# EAGLE board PCB_OpenBook (EAGLE 9.7.0)
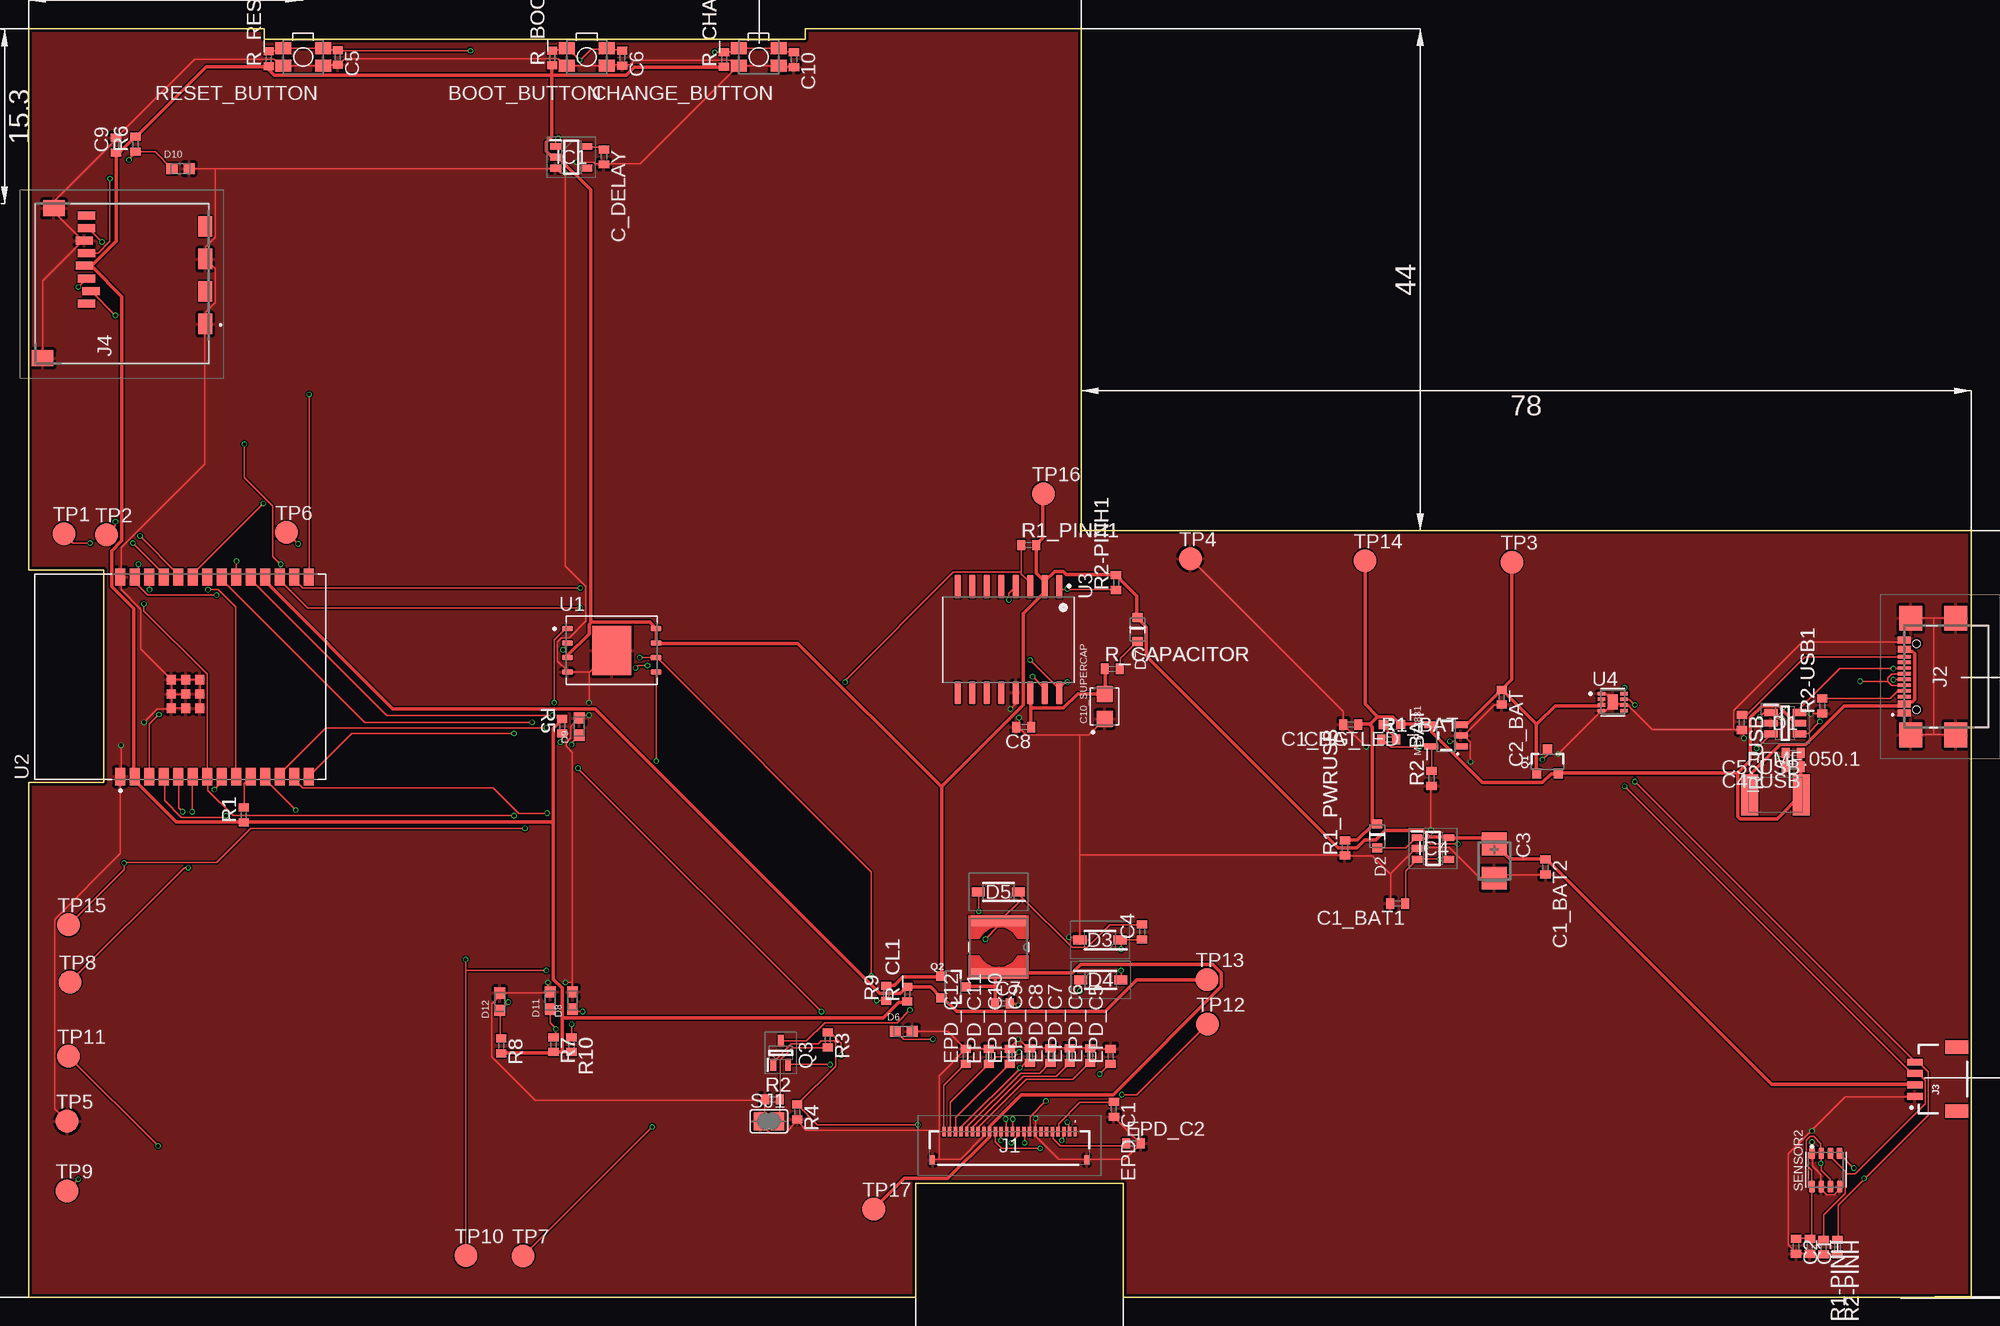
[diagram p0: board, top side]
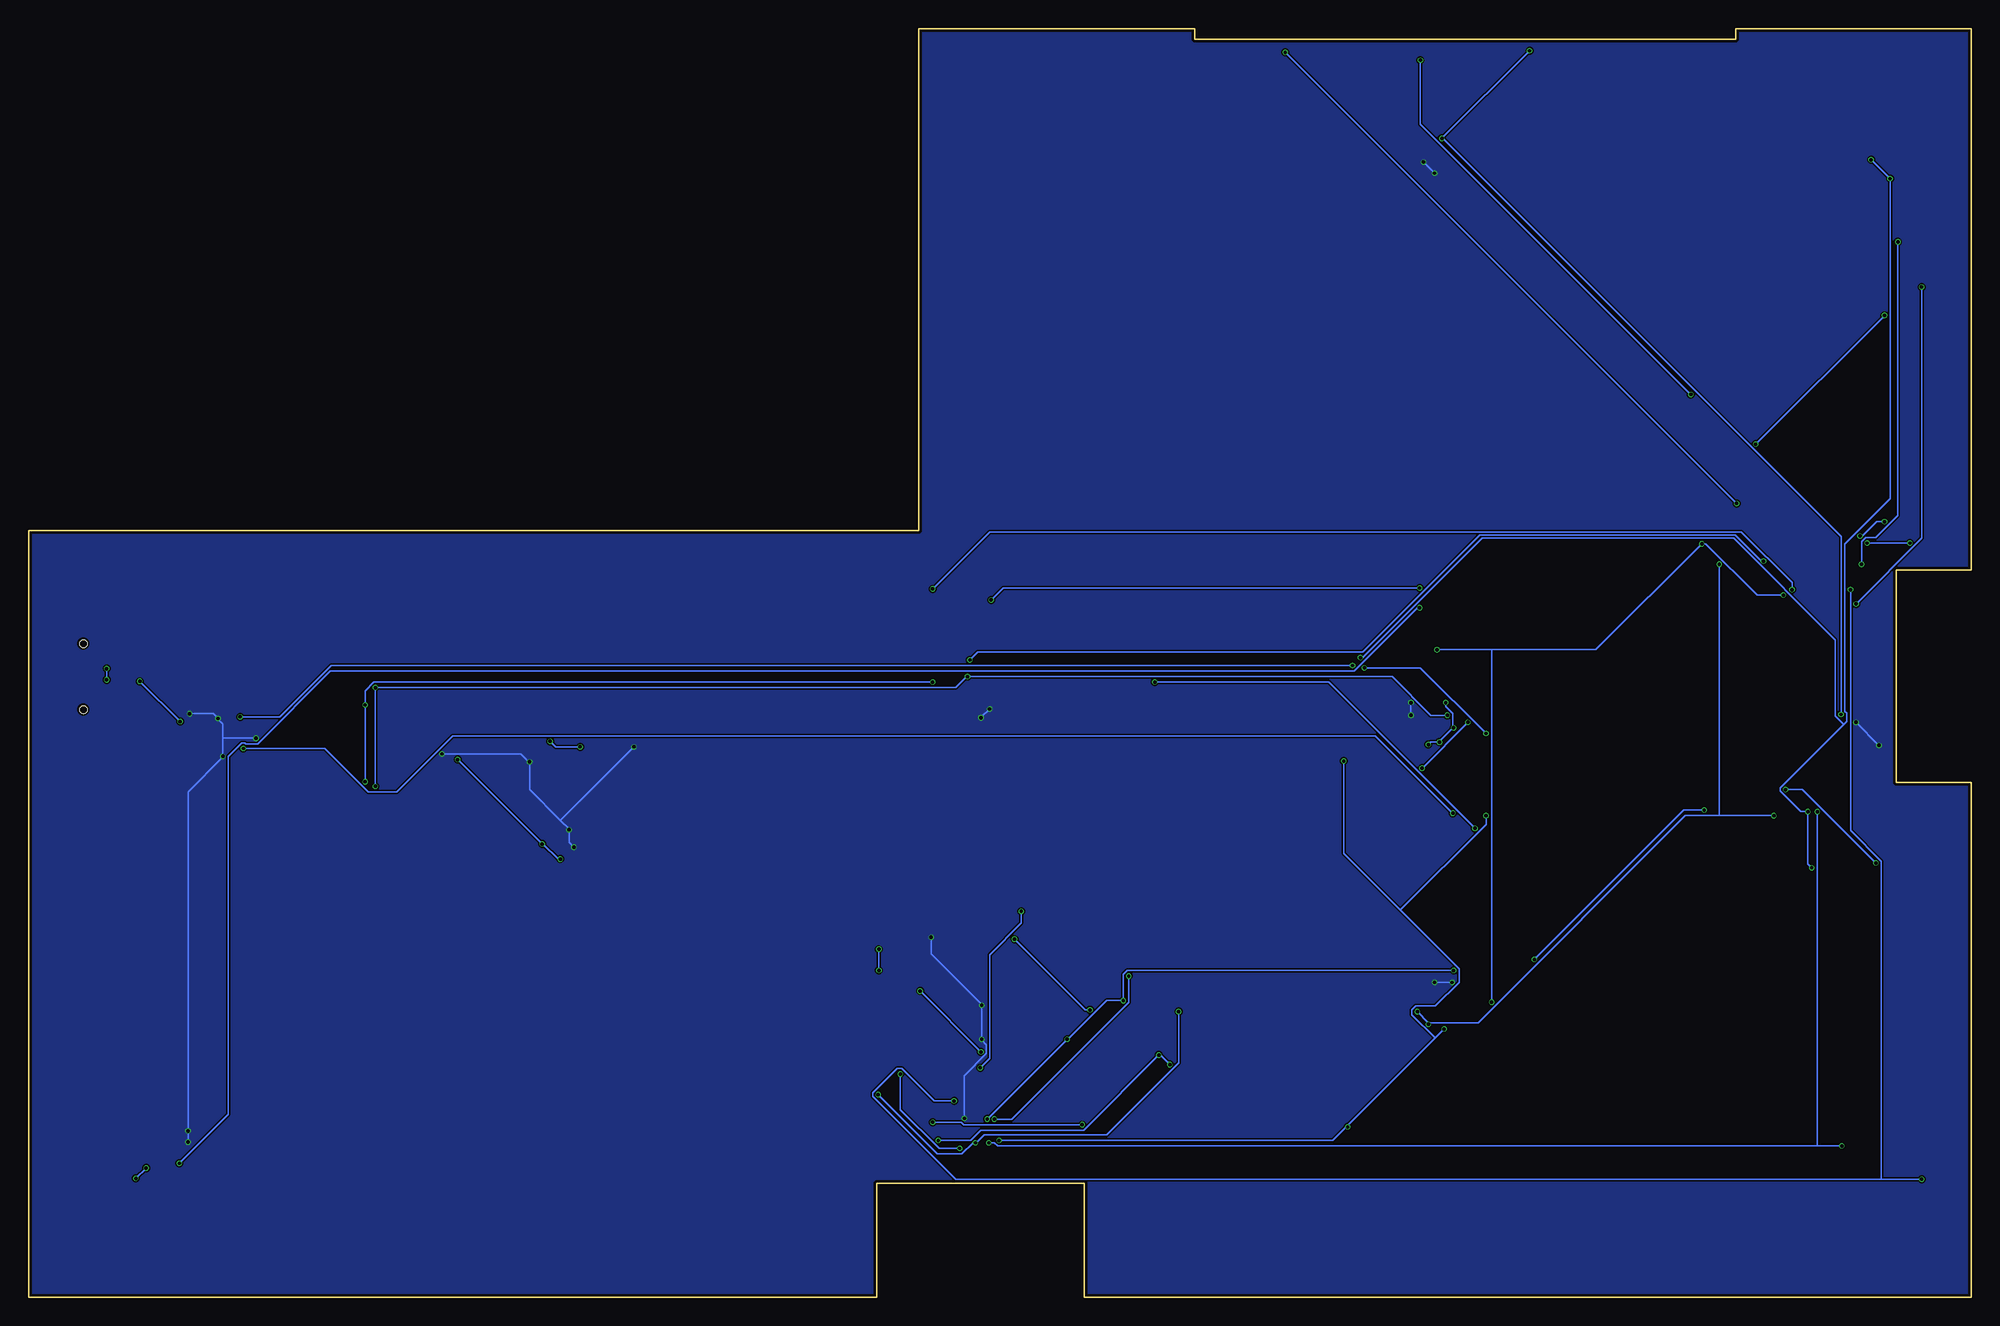
[diagram p1: board, bottom side, seen from below]

Size 170.2 x 111.2 mm. Coordinates in mm from the lower left corner, seen from the top.
Outline: 0,111.2 0,63.75 6.6,63.75 6.6,45.15 0,45.15 0,0 77.71,0 77.71,10 95.91,10 95.91,0 170.2,0 170.2,67.2 92.2,67.2 92.2,111.2 68.03,111.2 68.03,110.26 20.65,110.26 20.65,111.2 0,111.2
Copper layers (1*16): Top 0.035mm / dielectric 1.6mm / Bottom 0.035mm
Design rules "jlcpcb-2layers.dru *": minimum track width 0.15mm, minimum drill 0.3mm, track to track 5mil, track to pad 5mil, pad to pad 5mil, via to via 5mil, smd to smd 5mil, copper to edge 0.2mm, drill to drill 6mil, minimum pad ring 10mil, minimum via ring 3mil, stop-mask expansion 4mil, vias tented up to drill 0mil, thermal gap 10mil
Net classes: 1 trasee_putere: width 0.3 mm

## Footprints (pad centres in the part's own frame; a part is rotated, then mirrored left to right if it is on the bottom)
MYBUTTON = smd 1.4 x 1.05: 1 1.75,0.75; 2 -1.75,0.75; 3 -1.75,-0.75; 4 1.75,-0.75
ESP32_WROVER_EAGLE-LTSPICE_C0402 = smd 0.7 x 0.9: 1 -0.65,0; 2 0.65,0
RCL_CT3528 = smd 2 x 2.2: + -1.5,0; - 1.5,0
CAPCP3225X100N = smd 1.4 x 1.4: 1 -1.1,0; 2 1.1,0
ADAFRUIT_CHIP-LED0603 = smd 0.8 x 0.8: A 0,-0.75; C 0,0.75
SOT95P280X145-6N = smd 1.2 x 0.6: 1 -1.25,0.95; 2 -1.25,0; 3 -1.25,-0.95; 4 1.25,-0.95; 5 1.25,0; 6 1.25,0.95
ESP32_WROVER_AVX---SD0805S020S1R0_AVX_SD0805S020S1R0_0 = smd 0.8 x 0.9: 1 -1.05,0; 2 1.05,0
SOD3716X135N = smd 1.15 x 0.8: 1 -1.75,0; 2 1.75,0
DIOC1608X36N = smd 0.97 x 0.94: 1 -0.75,0; 2 0.75,0
SOT95P280X125-5N = smd 0.9 x 0.6: 1 -1.4,0.95; 2 -1.4,0; 3 -1.4,-0.95; 4 1.4,-0.95; 5 1.4,0.95
SOT95P280X120-5N = smd 0.9 x 0.6: 1 -1.4,0.95; 2 -1.4,0; 3 -1.4,-0.95; 4 1.4,-0.95; 5 1.4,0.95
FH34SRJ24S05SH99 = smd 0.3 x 0.8: 1 5.75,1.45; 2 5.25,1.45; 3 4.75,1.45; 4 4.25,1.45; 5 3.75,1.45; 6 3.25,1.45; 7 2.75,1.45; 8 2.25,1.45; 9 1.75,1.45; 10 1.25,1.45; 11 0.75,1.45; 12 0.25,1.45; 13 -0.25,1.45; 14 -0.75,1.45; 15 -1.25,1.45; 16 -1.75,1.45; 17 -2.25,1.45; 18 -2.75,1.45; 19 -3.25,1.45; 20 -3.75,1.45; 21 -4.25,1.45; 22 -4.75,1.45; 23 -5.25,1.45; 24 -5.75,1.45 | smd 0.4 x 0.8: MP1 6.75,-1.05; MP2 -6.75,-1.05
SAMACSYS_PARTS_USB4110GFA = smd 0.3 x 1.15: A1 -3.35,3.678; A4 -2.55,3.678; A5 -1.25,3.678; A6 -0.25,3.678; A7 0.25,3.678; A8 1.25,3.678; A9 2.55,3.678; A12 3.35,3.678; B1 3.05,3.678; B4 2.25,3.678; B5 1.75,3.678; B6 0.75,3.678; B7 -0.75,3.678; B8 -1.75,3.678; B9 -2.25,3.678; B12 -3.05,3.678 | smd 2.18 x 2: MP1 -5.11,-0.827; MP2 5.11,-0.827; MP3 -5.11,3.103; MP4 5.11,3.103 | hole 0.65: -2.89,2.603; 2.89,2.603
JST04_1MM_RA = smd 0.6 x 1.35: 1 -1.5,0; 2 -0.5,0; 3 0.5,0; 4 1.5,0 | smd 1.2 x 2: NC1 2.8,-3.675; NC2 -2.8,-3.675
112ATAARR03ATTEND = smd 1.8 x 1.2: G1 10.6,10.4; G2 4.9,10.4; S1 7.75,10.4; S2 2.05,10.4 | smd 1.4 x 1.9: G3 13.6,-3.85; G4 0.45,-2.85 | smd 0.7 x 1.5: P1 8.8,0; P2 7.7,0.4; P3 6.6,0; P4 5.5,-0.2; P5 4.4,0; P6 3.3,-0.2; P7 2.2,0; P8 1.1,0
IND_4828-WE-TPC_WRE = smd 0.889 x 4.826: 1 -2.286,0; 2 2.286,0
ESP32_WROVER_SPARKFUN-IC-POWER_SOT23-5 = smd 0.55 x 1.2: 1 -0.95,-1.3; 2 0,-1.3; 3 0.95,-1.3; 4 0.95,1.3; 5 -0.95,1.3
ESP32C6_VARISTOR_CT/CN1812 = smd 1.5 x 3.6: 1 -2.25,0; 2 2.25,0
ESP32_WROVER_SPARKFUN-DISCRETESEMI_SOT23-3 = smd 0.8 x 0.9: 1 -0.95,-1; 2 0.95,-1; 3 0,1.1
SOT65P210X110-3N = smd 1.05 x 0.5: 1 -1.05,0.65; 2 -1.05,-0.65; 3 1.05,0
ESP32_WROVER_BME680_PSON80P300X300X100-8N = smd 1.016 x 0.5: 1 1.458,1.2; 2 1.458,0.4; 3 1.458,-0.4; 4 1.458,-1.2; 5 -1.458,-1.22; 6 -1.458,-0.4; 7 -1.458,0.4; 8 -1.458,1.2
SJ = smd 1.168 x 1.6: 1 -0.762,0; 2 0.762,0
TP20R = smd 2 x 2: TP 0,0
SON127P600X800X80-9N = smd 0.94 x 0.44: 1 -3.895,1.905; 2 -3.895,0.635; 3 -3.895,-0.635; 4 -3.895,-1.905; 5 3.895,-1.905; 6 3.895,-0.635; 7 3.895,0.635; 8 3.895,1.905 | smd 3.4 x 4.3: 9 0,0
XCVR_ESP32-C6-WROOM-1-N8 = smd 1.5 x 0.9: 1 -8.75,5.26; 2 -8.75,3.99; 3 -8.75,2.72; 4 -8.75,1.45; 5 -8.75,0.18; 6 -8.75,-1.09; 7 -8.75,-2.36; 8 -8.75,-3.63; 9 -8.75,-4.9; 10 -8.75,-6.17; 11 -8.75,-7.44; 12 -8.75,-8.71; 13 -8.75,-9.98; 14 -8.75,-11.25; 15 8.75,-11.25; 16 8.75,-9.98; 17 8.75,-8.71; 18 8.75,-7.44; 19 8.75,-6.17; 20 8.75,-4.9; 21 8.75,-3.63; 22 8.75,-2.36; 23 8.75,-1.09; 24 8.75,0.18; 25 8.75,1.45; 26 8.75,2.72; 27 8.75,3.99; 28 8.75,5.26 | smd 0.8 x 0.8: 29_1 -2.755,0.79; 29_2 -1.505,0.79; 29_3 -0.255,0.79; 29_4 -2.755,-0.46; 29_5 -1.505,-0.46; 29_6 -0.255,-0.46; 29_7 -2.755,-1.71; 29_8 -1.505,-1.71; 29_9 -0.255,-1.71
SOIC127P1032X265-16N = smd 2.05 x 0.59: 1 -4.655,4.445; 2 -4.655,3.175; 3 -4.655,1.905; 4 -4.655,0.635; 5 -4.655,-0.635; 6 -4.655,-1.905; 7 -4.655,-3.175; 8 -4.655,-4.445; 9 4.655,-4.445; 10 4.655,-3.175; 11 4.655,-1.905; 12 4.655,-0.635; 13 4.655,0.635; 14 4.655,1.905; 15 4.655,3.175; 16 4.655,4.445
SON50P200X200X80-9N = smd 0.76 x 0.3: 1 -0.985,0.75; 2 -0.985,0.25; 3 -0.985,-0.25; 4 -0.985,-0.75; 5 0.985,-0.75; 6 0.985,-0.25; 7 0.985,0.25; 8 0.985,0.75 | smd 0.9 x 1.3: 9 0,0

## Placement (x,y rotation side)
BOOT_BUTTON  BUTTON_CUSYOMV11  [MYBUTTON]  48.9,108.71 180 top
C1  100nF  [ESP32_WROVER_EAGLE-LTSPICE_C0402]  156.05,4.48 270 top
C1_BAT  4.7uF  [ESP32_WROVER_EAGLE-LTSPICE_C0402]  115.84,50.2 180 top
C1_BAT1  4.7uF  [ESP32_WROVER_EAGLE-LTSPICE_C0402]  119.95,34.52 180 top
C1_BAT2  4.7uF  [ESP32_WROVER_EAGLE-LTSPICE_C0402]  132.89,37.72 270 top
C2  100nF  [ESP32_WROVER_EAGLE-LTSPICE_C0402]  154.83,4.48 270 top
C2_BAT  4.7uF  [ESP32_WROVER_EAGLE-LTSPICE_C0402]  129.05,52.6 270 top
C3  100uF TANT  [RCL_CT3528]  128.41,38.25 270 top
C4  4.7uF/25V  [ESP32_WROVER_EAGLE-LTSPICE_C0402]  97.55,32.04 90 top
C4_USB  100nF  [ESP32_WROVER_EAGLE-LTSPICE_C0402]  154.6,46.52 180 top
C5  1uF  [ESP32_WROVER_EAGLE-LTSPICE_C0402]  27.09,108.66 270 top
C5_USB  4.7uF  [ESP32_WROVER_EAGLE-LTSPICE_C0402]  154.58,47.72 180 top
C6  100nF  [ESP32_WROVER_EAGLE-LTSPICE_C0402]  52.01,108.61 270 top
C7  10uF  [ESP32_WROVER_EAGLE-LTSPICE_C0402]  85.3,25.78 0 top
C8  100nF  [ESP32_WROVER_EAGLE-LTSPICE_C0402]  87.19,49.98 180 top
C9  100nF  [ESP32_WROVER_EAGLE-LTSPICE_C0402]  7.67,100.98 90 top
C10  100nF  [ESP32_WROVER_EAGLE-LTSPICE_C0402]  67.05,108.48 270 top
C10_SUPERCAP  CPH3225A  [CAPCP3225X100N]  94.26,51.79 90 top
C_DELAY  100nF  [ESP32_WROVER_EAGLE-LTSPICE_C0402]  50.41,99.94 270 top
CHANGE_BUTTON  BUTTON_CUSYOMV11  [MYBUTTON]  63.96,108.71 180 top
CHG_LED  [ADAFRUIT_CHIP-LED0603]  119.44,50.2 90 top
D1  USBLC6-2SC6Y  [SOT95P280X145-6N]  153.88,50.32 0 top
D2  ESP32_WROVER_AVX---SD0805S020S1R0_AVX_SD0805S020S1R0_0_01  [ESP32_WROVER_AVX---SD0805S020S1R0_AVX_SD0805S020S1R0_0]  118.15,40.43 270 top
D3  MBR0530  [SOD3716X135N]  93.86,31.32 180 top
D4  MBR0530  [SOD3716X135N]  93.92,27.83 0 top
D5  MBR0530  [SOD3716X135N]  84.96,35.53 180 top
D6  PGB1010603MR  [DIOC1608X36N]  76.68,23.32 0 top
D7  ESP32_WROVER_AVX---SD0805S020S1R0_AVX_SD0805S020S1R0_0_01  [ESP32_WROVER_AVX---SD0805S020S1R0_AVX_SD0805S020S1R0_0]  97.14,58.53 270 top
D8  PGB1010603MR  [DIOC1608X36N]  47.66,26.02 90 top
D9  PGB1010603MR  [DIOC1608X36N]  48.24,50.02 90 top
D10  PGB1010603MR  [DIOC1608X36N]  13.32,98.92 0 top
D11  PGB1010603MR  [DIOC1608X36N]  45.7,26.02 90 top
D12  PGB1010603MR  [DIOC1608X36N]  41.28,25.92 90 top
EPD_C1  1uF/50V  [ESP32_WROVER_EAGLE-LTSPICE_C0402]  95.08,16.5 270 top
EPD_C2  1uF/50V  [ESP32_WROVER_EAGLE-LTSPICE_C0402]  96.79,13.5 0 top
EPD_C5  0.1uF/50V  [ESP32_WROVER_EAGLE-LTSPICE_C0402]  94.79,21.14 90 top
EPD_C6  1uF/50V  [ESP32_WROVER_EAGLE-LTSPICE_C0402]  93,21.2 90 top
EPD_C7  1uF/50V  [ESP32_WROVER_EAGLE-LTSPICE_C0402]  91.21,21.2 90 top
EPD_C8  1uF/50V  [ESP32_WROVER_EAGLE-LTSPICE_C0402]  89.52,21.2 90 top
EPD_C9  1uF/50V  [ESP32_WROVER_EAGLE-LTSPICE_C0402]  87.73,21.2 90 top
EPD_C10  1uF/50V  [ESP32_WROVER_EAGLE-LTSPICE_C0402]  85.95,21.14 90 top
EPD_C11  1uF/50V  [ESP32_WROVER_EAGLE-LTSPICE_C0402]  84.11,21.12 90 top
EPD_C12  1uF/50V  [ESP32_WROVER_EAGLE-LTSPICE_C0402]  82.09,21.14 90 top
IC1  BD5229G-TR  [SOT95P280X125-5N]  47.55,99.92 0 top
IC4  XC6220A331MR-G  [SOT95P280X120-5N]  123.03,39.34 0 top
J1  FH34SRJ-24S-0.5SH_99_  [FH34SRJ24S05SH99]  85.94,13.09 0 top
J2  SAMACSYS_PARTS_USB4110-GF-A  [SAMACSYS_PARTS_USB4110GFA]  167.99,54.41 90 top
J3  QWIIC_RIGHT_ANGLE  [JST04_1MM_RA]  165.25,19.13 90 top
J4  112A-TAAR-R03_ATTEND  [112ATAARR03ATTEND]  5.08,95.9 270 top
L1  68uH  [IND_4828-WE-TPC_WRE]  84.97,30.7 270 top
MCP73831  ESP32_WROVER_SPARKFUN-IC-POWER_MCP73831  [ESP32_WROVER_SPARKFUN-IC-POWER_SOT23-5]  124.18,49.24 90 top
PFMF.050.1  ESP32C6_VARISTORCN1812  [ESP32C6_VARISTOR_CT/CN1812]  153.04,44.05 0 top
Q1  20V/4.2A/52mΩ/1.4W  [ESP32_WROVER_SPARKFUN-DISCRETESEMI_SOT23-3]  133.06,46.91 0 top
Q2  20V/4.2A/52mΩ/1.4W  [ESP32_WROVER_SPARKFUN-DISCRETESEMI_SOT23-3]  80.98,27.21 270 top
Q3  SI1308EDL-T1-GE3  [SOT65P210X110-3N]  65.89,21.43 90 top
R1  10K  [ESP32_WROVER_EAGLE-LTSPICE_C0402]  18.85,42.27 90 top
R1-PINH  10K  [ESP32_WROVER_EAGLE-LTSPICE_C0402]  157.25,4.42 270 top
R1_BAT  200  [ESP32_WROVER_EAGLE-LTSPICE_C0402]  119.16,48.9 0 top
R1_PINH1  10K  [ESP32_WROVER_EAGLE-LTSPICE_C0402]  87.61,65.94 0 top
R1_PWRUSB  100K  [ESP32_WROVER_EAGLE-LTSPICE_C0402]  115.32,39.39 90 top
R2  2.2  [ESP32_WROVER_EAGLE-LTSPICE_C0402]  65.17,17.36 0 top
R2-PINH  10K  [ESP32_WROVER_EAGLE-LTSPICE_C0402]  158.46,4.42 270 top
R2-PINH1  10K  [ESP32_WROVER_EAGLE-LTSPICE_C0402]  95.27,62.64 90 top
R2-USB  5k1  [ESP32_WROVER_EAGLE-LTSPICE_C0402]  150.09,50.38 270 top
R2-USB1  5k1  [ESP32_WROVER_EAGLE-LTSPICE_C0402]  157.13,51.82 90 top
R2_BAT  2K  [ESP32_WROVER_EAGLE-LTSPICE_C0402]  122.9,45.48 90 top
R3  0.47  [ESP32_WROVER_EAGLE-LTSPICE_C0402]  70.02,22.58 270 top
R4  10K  [ESP32_WROVER_EAGLE-LTSPICE_C0402]  67.33,16.26 270 top
R5  10K  [ESP32_WROVER_EAGLE-LTSPICE_C0402]  46.75,50.06 90.6 top
R6  10K  [ESP32_WROVER_EAGLE-LTSPICE_C0402]  9.37,101.06 90 top
R7  10K  [ESP32_WROVER_EAGLE-LTSPICE_C0402]  45.99,22.16 270 top
R8  10K  [ESP32_WROVER_EAGLE-LTSPICE_C0402]  41.41,22.06 270 top
R9  10K  [ESP32_WROVER_EAGLE-LTSPICE_C0402]  75.13,26.66 90 top
R10  10K  [ESP32_WROVER_EAGLE-LTSPICE_C0402]  47.57,22.16 270 top
R_BOOT  10K  [ESP32_WROVER_EAGLE-LTSPICE_C0402]  45.87,108.62 90 top
R_CAPACITOR  15  [ESP32_WROVER_EAGLE-LTSPICE_C0402]  94.92,55.09 0 top
R_CHANGE  10K  [ESP32_WROVER_EAGLE-LTSPICE_C0402]  60.93,108.49 90 top
R_CL1  10K  [ESP32_WROVER_EAGLE-LTSPICE_C0402]  76.97,26.58 90 top
R_RESET  10K  [ESP32_WROVER_EAGLE-LTSPICE_C0402]  21.03,108.54 90 top
RESET_BUTTON  BUTTON_CUSYOMV11  [MYBUTTON]  24.06,108.71 180 top
SENSOR2  ESP32_WROVER_BME680_BME680  [ESP32_WROVER_BME680_PSON80P300X300X100-8N]  157.44,11.17 90 top
SJ1  [SJ]  64.86,15.44 0 top
TP1  TP1  [TP20R]  3.11,66.94 0 top
TP2  TP1  [TP20R]  6.83,66.84 0 top
TP3  TP1  [TP20R]  129.95,64.44 0 top
TP4  TP1  [TP20R]  101.77,64.74 0 top
TP5  TP1  [TP20R]  3.39,15.44 0 top
TP6  TP1  [TP20R]  22.61,67.04 0 top
TP7  TP1  [TP20R]  43.33,3.64 0 top
TP8  TP1  [TP20R]  3.65,27.64 0 top
TP9  TP1  [TP20R]  3.37,9.34 0 top
TP10  TP1  [TP20R]  38.32,3.66 0 top
TP11  TP1  [TP20R]  3.49,21.14 0 top
TP12  TP1  [TP20R]  103.29,23.96 0 top
TP13  TP1  [TP20R]  103.22,27.86 0 top
TP14  TP1  [TP20R]  117.07,64.56 0 top
TP15  TP1  [TP20R]  3.52,32.66 0 top
TP16  TP1  [TP20R]  88.89,70.44 0 top
TP17  TP1  [TP20R]  74.04,7.74 0 top
U1  W25Q512JVEIQ  [SON127P600X800X80-9N]  51.09,56.71 0 top
U2  ESP32-C6-WROOM-1-N8  [XCVR_ESP32-C6-WROOM-1-N8]  13.3,54.39 90 top
U3  DS3231SN#  [SOIC127P1032X265-16N]  85.85,57.65 270 top
U4  MAX17048G+T10  [SON50P200X200X80-9N]  138.77,52.17 0 top

## Library data of the parts
BOOT_BUTTON C1 C1_BAT C1_BAT1 C1_BAT2 C2 C2_BAT C4 C4_USB C5 C5_USB C6-C10 C_DELAY CHANGE_BUTTON CHG_LED D2-D12 EPD_C1 EPD_C2 EPD_C5-EPD_C12 PFMF.050.1 Q1 Q2 R1 R1-PINH R1_BAT R1_PINH1 R1_PWRUSB R2 R2-PINH R2-PINH1 R2-USB R2-USB1 R2_BAT R3-R10 R_BOOT R_CAPACITOR R_CHANGE R_CL1 R_RESET RESET_BUTTON SJ1 TP1-TP17 = DeskAssistant v19 v1
C3 = DeskAssistant v19 v1; SPICEPREFIX: C
C10_SUPERCAP = DeskAssistant v19 v1; AVAILABILITY: Not in stock; CHECK_PRICES: https://www.snapeda.com/parts/CPH3225A/Seiko+Instruments/view-part/?ref=eda; DESCRIPTION: 11 mF (EDLC) Supercapacitor 3.3 V 1210 (3225 Metric) - -; MF: Seiko Instruments; MP: CPH3225A; PACKAGE: 1210 Seiko; PRICE: None; PURCHASE-URL: https://www.snapeda.com/api/url_track_click_mouser/?unipart_id=562593&manufacturer=Seiko Instruments&part_name=CPH3225A&search_term=None; SNAPEDA_LINK: https://www.snapeda.com/parts/CPH3225A/Seiko+Instruments/view-part/?ref=snap
D1 = DeskAssistant v19 v1; AVAILABILITY: In Stock; CHECK_PRICES: https://www.snapeda.com/parts/USBLC6-2SC6Y/STMicroelectronics/view-part/?ref=eda; DESCRIPTION: 17V Clamp 5A (8/20µs) Ipp Tvs Diode Surface Mount SOT-23-6; MF: STMicroelectronics; MP: USBLC6-2SC6Y; PACKAGE: SOT-23-6 STMicroelectronics; PRICE: None; SNAPEDA_LINK: https://www.snapeda.com/parts/USBLC6-2SC6Y/STMicroelectronics/view-part/?ref=snap
IC1 = DeskAssistant v19 v1; DESCRIPTION: Voltage Detector with Adjustable Delay Time: CMOS processes are utilized to develop high precision, low current consumption CMOS reset ICs that allow arbitrary setting of the delay time. The extensive lineup includes both Nch Open Drain and CMOS output types in a wide range of detection voltages (from 2.3V to 6.0V, in 0.1V steps), enabling selection of the ideal solution based on customer requirements. In addition, the entire series is of course both lead-free and RoHS-compliant.; HEIGHT: 1.25mm; MANUFACTURER_NAME: ROHM Semiconductor; MANUFACTURER_PART_NUMBER: BD5229G-TR; MOUSER_PART_NUMBER: 755-BD5229G-TR; MOUSER_PRICE-STOCK: https://www.mouser.co.uk/ProductDetail/ROHM-Semiconductor/BD5229G-TR?qs=4kLU8WoGk0vvnhrrYwdszw%3D%3D
IC4 = DeskAssistant v19 v1; DESCRIPTION: LDO Voltage Regulators; HEIGHT: 1.2mm; MANUFACTURER_NAME: Torex; MANUFACTURER_PART_NUMBER: XC6220A331MR-G; MOUSER_PART_NUMBER: 865-XC6220A331MR-G; MOUSER_PRICE-STOCK: https://www.mouser.co.uk/ProductDetail/Torex-Semiconductor/XC6220A331MR-G?qs=AsjdqWjXhJ8ZSWznL1J0gg%3D%3D
J1 = DeskAssistant v19 v1; DESCRIPTION: 24 Position FFC, FPC Connector Contacts, Top and Bottom 0.020" (0.50mm) Surface Mount, Right Angle; HEIGHT: 1.1mm; MANUFACTURER_NAME: Hirose; MANUFACTURER_PART_NUMBER: FH34SRJ-24S-0.5SH(99); MOUSER_PART_NUMBER: 798-FH34SRJ24S05SH99; MOUSER_PRICE-STOCK: https://www.mouser.co.uk/ProductDetail/Hirose-Connector/FH34SRJ-24S-0.5SH99?qs=vcbW%252B4%252BSTIpKBl5ap9J8Fw%3D%3D
J2 = DeskAssistant v19 v1; DESCRIPTION: CONN USB 2.0 TYPE-C R/A SMT; HEIGHT: 3.26mm; MANUFACTURER_NAME: GCT (GLOBAL CONNECTOR TECHNOLOGY); MANUFACTURER_PART_NUMBER: USB4110-GF-A; MOUSER_PART_NUMBER: 640-USB4110-GF-A; MOUSER_PRICE-STOCK: https://www.mouser.co.uk/ProductDetail/GCT/USB4110-GF-A?qs=KUoIvG%2F9IlYiZvIXQjyJeA%3D%3D
J3 = DeskAssistant v19 v1; PROD_ID: CONN-13694
J4 = DeskAssistant v19 v1; DESCRIPTION: Micro SD Card Socket, Push-Push Type, Top Mount, SMT, H=1.83mm, 10u; HEIGHT: 1.9mm; MANUFACTURER_NAME: ATTEND; MANUFACTURER_PART_NUMBER: 112A-TAAR-R03 ATTEND
L1 = DeskAssistant v19 v1; COPYRIGHT: Copyright (C) 2024 Ultra Librarian. All rights reserved.; MANUFACTURER_PART_NUMBER: 744043680; MFR_NAME: Wurth Electronics
MCP73831 = DeskAssistant v19 v1; PROD_ID: IC-09995
Q3 = DeskAssistant v19 v1; AVAILABILITY: In Stock; CHECK_PRICES: https://www.snapeda.com/parts/SI1308EDL-T1-GE3/Vishay+Siliconix/view-part/?ref=eda; DESCRIPTION: Si1308EDL-T1-GE3 N-channel MOSFET Transistor, 1.5 A, 30 V, 3-Pin SC-70 | Siliconix / Vishay SI1308EDL-T1-GE3; MF: Vishay Siliconix; MP: SI1308EDL-T1-GE3; PACKAGE: SOT-323 Vishay Semiconductor; PRICE: None; PURCHASE-URL: https://www.snapeda.com/api/url_track_click_mouser/?unipart_id=274603&manufacturer=Vishay Siliconix&part_name=SI1308EDL-T1-GE3&search_term=None; SNAPEDA_LINK: https://www.snapeda.com/parts/SI1308EDL-T1-GE3/Vishay+Siliconix/view-part/?ref=snap
SENSOR2 = DeskAssistant v19 v1; AVAILABILITY: Unavailable; DESCRIPTION: Integrated Environmental Unit; MF: Bosch Sensortec; MP: BME680; PACKAGE: LGA-8 Bosch Tools; PRICE: None
U1 = DeskAssistant v19 v1; AVAILABILITY: In Stock; CHECK_PRICES: https://www.snapeda.com/parts/W25Q512JVEIQ/Winbond+Electronics/view-part/?ref=eda; DESCRIPTION: FLASH - NOR Memory IC 512Mb (64M x 8) SPI - Quad I/O 133 MHz 8-WSON (8x6); MF: Winbond Electronics; MP: W25Q512JVEIQ; PACKAGE: Package; PRICE: None; SNAPEDA_LINK: https://www.snapeda.com/parts/W25Q512JVEIQ/Winbond+Electronics/view-part/?ref=snap
U2 = DeskAssistant v19 v1; AVAILABILITY: In Stock; CHECK_PRICES: https://www.snapeda.com/parts/ESP32-C6-WROOM-1-N8/Espressif+Systems/view-part/?ref=eda; DESCRIPTION: Multiprotocol Modules ESP32-C6 module, Wi-Fi 6 in 2.4 GHz band, Bluetooth 5, Zigbee 3.0 and Thread. ESP34-WROOM Compatible - ENGINEERING SAMPLE; MF: Espressif Systems; MP: ESP32-C6-WROOM-1-N8; PACKAGE: None; PRICE: None; SNAPEDA_LINK: https://www.snapeda.com/parts/ESP32-C6-WROOM-1-N8/Espressif+Systems/view-part/?ref=snap
U3 = DeskAssistant v19 v1; AVAILABILITY: In Stock; CHECK_PRICES: https://www.snapeda.com/parts/DS3231SN%23/Analog+Devices/view-part/?ref=eda; DESCRIPTION: Extremely Accurate I²C-Integrated RTC/TCXO/Crystal; MF: Analog Devices; MP: DS3231SN#; PACKAGE: SOIC-16 Maxim; PRICE: None; PURCHASE-URL: https://www.snapeda.com/api/url_track_click_mouser/?unipart_id=99048&manufacturer=Analog Devices&part_name=DS3231SN#&search_term=None; SNAPEDA_LINK: https://www.snapeda.com/parts/DS3231SN%23/Analog+Devices/view-part/?ref=snap
U4 = DeskAssistant v19 v1; AVAILABILITY: In Stock; CHECK_PRICES: https://www.snapeda.com/parts/MAX17048G+T10/Analog+Devices/view-part/?ref=eda; DESCRIPTION: 3µA 1-Cell/2-Cell Fuel Gauge with ModelGauge; MF: Analog Devices; MP: MAX17048G+T10; PACKAGE: TDFN-8 Maxim; PRICE: None; PURCHASE-URL: https://www.snapeda.com/api/url_track_click_mouser/?unipart_id=329239&manufacturer=Analog Devices&part_name=MAX17048G+T10&search_term=None; SNAPEDA_LINK: https://www.snapeda.com/parts/MAX17048G+T10/Analog+Devices/view-part/?ref=snap

## Nets
2C_PW: R1-PINH.2 R2-PINH.2
3V3 [trasee_putere]: C1_BAT2.1 C3.+ C9.1 D7.1 IC1.2 IC4.5 J3.2 J4.P4 Q2.1 R1.1 R1_PINH1.2 R2-PINH1.2 R5.2 R6.2 R7.2 R8.2 R9.2 R10.2 R_BOOT.1 R_CHANGE.1 R_CL1.1 R_RESET.1 TP16.TP U1.3 U1.7 U1.8 U2.2 U3.2
32KHZ: R2-PINH1.1 U2.9 U3.1
DN: D1.4 J2.A7 J2.B7
DP: D1.6 J2.A6 J2.B6
EPD_3V3 [trasee_putere]: C7.1 J1.16 L1.2 Q2.3 TP17.TP
EPD_3V3_C [trasee_putere]: Q2.2 R_CL1.2 TP13.TP U2.18
EPD_BUSY: J1.9 TP9.TP U2.26
EPD_CS: D6.1 J1.12 R9.1 TP10.TP U2.11
EPD_DC: J1.11 TP11.TP U2.5
EPD_RST: J1.10 TP12.TP U2.21
FLASH_CS: D9.1 R5.1 U1.1 U2.12
GDR: J1.2 Q3.1 R4.1
GND: BOOT_BUTTON.1 BOOT_BUTTON.2 C1.2 C1_BAT1.2 C1_BAT2.2 C1_BAT.2 C2.2 C2_BAT.2 C3.- C4_USB.2 C5.2 C5_USB.2 C6.2 C7.2 C8.2 C9.2 C10.2 C10_SUPERCAP.1 C_DELAY.2 CHANGE_BUTTON.1 CHANGE_BUTTON.2 D1.2 D3.2 D6.2 D8.2 D9.2 D10.2 D11.2 D12.2 EPD_C1.2 EPD_C2.2 EPD_C5.2 EPD_C6.2 EPD_C7.2 EPD_C8.2 EPD_C9.2 EPD_C10.2 EPD_C11.2 EPD_C12.2 IC1.3 IC4.2 J1.8 J1.17 J1.MP1 J1.MP2 J2.A1 J2.A12 J2.B1 J2.B12 J2.MP1 J2.MP2 J2.MP3 J2.MP4 J3.1 J4.G1 J4.G2 J4.G3 J4.G4 J4.P6 MCP73831.2 R1_PWRUSB.1 R2-USB1.1 R2-USB.2 R2.1 R2_BAT.1 R4.2 RESET_BUTTON.1 RESET_BUTTON.2 SENSOR2.1 SENSOR2.5 SENSOR2.7 SJ1.1 TP4.TP TP5.TP U1.4 U1.9 U2.1 U2.28 U2.29_1 U2.29_2 U2.29_3 U2.29_4 U2.29_5 U2.29_6 U2.29_7 U2.29_8 U2.29_9 U3.13 U4.1 U4.4 U4.6 U4.9
GPIO8: R1.2 U2.10
I2C_PW: C1.1 C2.1 SENSOR2.2 SENSOR2.6 SENSOR2.8 U2.17
INT_RTC: R1_PINH1.1 TP15.TP U2.8 U3.3
IO/BOOT: BOOT_BUTTON.3 BOOT_BUTTON.4 C6.1 R_BOOT.2 U2.15
IO/CHANGE: C10.1 CHANGE_BUTTON.3 CHANGE_BUTTON.4 R_CHANGE.2 U2.23
MISO: D12.1 J4.P7 R8.1 TP6.TP U1.2 U2.27
MOSI: D11.1 J1.14 J4.P3 R7.1 TP7.TP U1.5 U2.7
N$1: J2.A5 R2-USB1.2
N$2: J2.B5 R2-USB.1
N$3: C1_BAT1.1 D2.2 IC4.1 IC4.3 Q1.3
N$4: MCP73831.1 R1_BAT.1
N$5: CHG_LED.C R1_BAT.2
N$6: C4.1 D3.1 D4.2
N$7: EPD_C12.1 J1.24
N$8: MCP73831.5 R2_BAT.2
N$9: EPD_C6.1 J1.18
N$10: EPD_C7.1 J1.19
N$11: EPD_C8.1 J1.20
N$12: C_DELAY.1 IC1.5
N$13: EPD_C10.1 J1.22
N$14: D7.2 R_CAPACITOR.2
N$16: EPD_C5.1 J1.15
N$17: EPD_C2.1 J1.5
N$18: EPD_C1.1 J1.4
PREVGH: D5.2 EPD_C9.1 J1.21
PREVGL: D4.1 EPD_C11.1 J1.23
RESE: J1.3 Q3.2 R3.1
RESE': R2.2 R3.2 SJ1.2
RESET: C5.1 IC1.1 R_RESET.2 RESET_BUTTON.3 RESET_BUTTON.4 U2.3
RTC_RST: U2.16 U3.4
RX: TP2.TP U2.24
SCK: D10.1 J1.13 J4.P5 R6.1 TP8.TP U1.6 U2.6
SCL: J3.4 R2-PINH.1 SENSOR2.4 U2.20 U3.16 U4.7
SDA: J3.3 R1-PINH.1 SENSOR2.3 U2.19 U3.15 U4.8
SRC: C4.2 D5.1 L1.1 Q3.3
SS_SD: D8.1 J4.P2 R10.1 U2.4
TX: TP1.TP U2.25
USB_D+: D1.1 U2.14
USB_D-: D1.3 U2.13
VBAT [trasee_putere]: C2_BAT.1 MCP73831.3 Q1.1 TP3.TP U4.2 U4.3
VBUS [trasee_putere]: C1_BAT.1 C4_USB.1 C5_USB.1 CHG_LED.A D1.5 D2.1 MCP73831.4 PFMF.050.1.2 Q1.2 R1_PWRUSB.2 TP14.TP
VRTC [trasee_putere]: C8.1 C10_SUPERCAP.2 R_CAPACITOR.1 U3.14
VUSB [trasee_putere]: J2.A4 J2.A9 J2.B4 J2.B9 PFMF.050.1.1

## Tracks (layer width: path | path; a pad name or v marks a point on that pad's centre or on a via)
2C_PW
  Top 0.15: R1-PINH.2 157.27,3.79 158.44,3.79 R2-PINH.2
3V3
  Top 0.3: R8.2 41.41,21.45 45.98,21.45 R7.2 46.12,21.52 46.74,21.52 | 46.74,21.52 47.51,21.52 R10.2 | 45.98,41.67 45.98,27.89 46.74,27.13 46.74,24.49 | 45.98,41.67 45.98,49.84 46.67,50.53 46.67,50.67 R5.2 | 46.74,21.52 46.74,24.49 | 46.74,24.49 74.86,24.49 76.24,25.88 76.94,25.88 R_CL1.1 | 45.98,41.67 18.97,41.67 R1.1 18.84,41.67 12.95,41.67 9.35,45.27 9.35,45.62 U2.2 9.21,45.75 9.21,60.37 7.27,62.31 7.27,65.42 8.17,66.32 8.17,87.72 5.61,90.28 J4.P4 4.92,90.42 5.54,90.42 7.69,92.57 7.69,100.19 C9.1 7.69,100.39 8.03,100.39 9.35,101.71 R6.2 9.49,101.78 15.58,107.87 20.98,107.87 R_RESET.1 20.91,107.73 21.54,107.11 45.84,107.11 | 45.84,107.11 45.84,101.71 45.36,101.22 45.36,100.46 45.84,99.98 46.12,99.98 IC1.2 46.26,99.84 46.47,99.84 49.24,97.07 49.24,59.33 49.31,59.19 | 45.84,107.11 45.84,107.94 R_BOOT.1 | 45.84,107.11 52.35,107.11 53.05,107.8 60.87,107.8 R_CHANGE.1 | J3.2 165.23,18.68 152.7,18.68 133.03,38.34 C1_BAT2.1 132.82,38.41 129.77,38.41 128.53,39.66 C3.+ 128.39,39.8 127.91,40.28 124.44,40.28 IC4.5 124.3,40.35 122.71,40.35 122.16,40.91 118.83,40.91 118,40.08 117.03,40.08 116.34,39.38 114.75,39.38 97.92,56.21 97.92,58.77 97.23,59.47 D7.1 97.09,59.6 97.09,61.48 95.29,63.27 R2-PINH1.2 95.15,63.34 90.92,63.34 90.65,63.62 89.89,63.62 89.12,62.86 U3.2 | 49.31,59.19 49.1,58.98 49.1,58.15 47.23,56.28 47.23,56.14 U1.3 | 49.31,59.19 54.43,59.19 54.98,58.63 U1.8 54.98,58.5 54.98,57.39 U1.7 55.12,57.32 67.38,57.32 79.84,44.85 79.98,44.78 | R9.2 75.14,27.33 75.83,27.33 76.59,28.1 79.92,28.1 Q2.1 79.98,28.3 79.98,44.78 | U3.2 88.99,62.31 88.99,62.79 88.29,63.48 88.29,65.91 R1_PINH1.2 88.36,66.05 88.85,66.53 88.85,70.41 TP16.TP
  Top 0.3: 79.98,44.78 87.12,51.92 87.12,59.95 88.92,61.75 88.92,62.17 U3.2
32KHZ  (via drill 0.3)
  Top 0.15: 91,62.03 90.51,62.03 90.3,62.24 U3.1 | 91,62.03 95.22,62.03 R2-PINH1.1 | v15.72,62.03 16.62,62.03 18.14,60.5 18.14,45.69 U2.9 | v91,62.1 91,62.03
  Bottom 0.15: v15.72,62.03 15.72,62.65 20.15,67.08 86.01,67.08 v91,62.1
DN  (via drill 0.3)
  Top 0.15: 162.88,54 163.22,53.65 164.26,53.65 J2.B7 | 162.88,54 162.88,54.27 163.22,54.62 164.26,54.62 J2.A7 | v156.92,50.46 155.88,49.42 155.19,49.42 D1.4 | 162.88,54 v160.45,54
  Bottom 0.15: v160.45,54 v156.92,50.46
DP  (via drill 0.3)
  Top 0.15: v163.36,54.13 164.26,54.13 J2.A6 | J2.B6 164.26,55.1 v163.36,55.1 158.65,55.1 155.19,51.64 155.19,51.3 D1.6
  Bottom 0.15: v163.36,55.1 v163.36,54.13
EPD_3V3
  Top 0.3: 84.69,27.26 84.69,28.1 84.97,28.37 L1.2 85.11,28.44 91.41,28.44 92.17,29.2 103.74,29.2 104.5,28.44 104.5,27.26 95.01,17.78 86.98,17.78 84.21,15.01 84.21,14.66 J1.16 84.14,14.52 84.14,14.04 80.54,10.44 76.73,10.44 74.1,7.81 TP17.TP | 84.69,27.26 84.69,25.81 C7.1 | 84.69,27.26 82.13,27.26 Q2.3
EPD_3V3_C
  Top 0.3: U2.18 20.77,63.14 20.77,62.72 31.92,51.57 49.65,51.57 74.58,26.64 76.38,26.64 76.87,27.13 R_CL1.2 77.01,27.2 79.01,27.2 79.92,26.3 Q2.2 80.12,26.23 81.3,25.05 94.32,25.05 97.09,27.82 103.18,27.82 TP13.TP
EPD_BUSY  (via drill 0.3)
  Top 0.15: v89.12,17.22 87.74,15.84 87.74,14.59 J1.9 | v4.36,10.37 3.39,9.4 TP9.TP | v10.6,62.03 10.6,63.14 U2.26
  Bottom 0.15: v89.12,17.22 90.86,17.22 93.69,20.06 94.11,20.06 96.26,17.92 96.26,17.64 88.99,10.37 7.89,10.37 | v4.36,10.37 7.89,10.37 | v10.6,62.03 10.6,40.91 7.89,38.21 7.89,10.37
EPD_CS  (via drill 0.3)
  Top 0.15: v86.22,15.63 86.22,14.59 J1.12 | v79.22,22.62 76.66,22.62 75.97,23.32 D6.1 | v74.31,26.02 75.07,26.02 R9.1 | v23.41,42.71 20.77,45.34 20.77,45.62 U2.11 | 38.3,28.65 38.3,3.72 TP10.TP | 38.3,28.65 v38.3,29.62 | 38.3,28.65 v45.36,28.65
  Bottom 0.15: v86.22,15.63 v79.22,22.62 79.15,22.62 75.76,26.02 v74.31,26.02 74.31,28.3 73.96,28.65 v45.36,28.65 | v23.41,42.71 25.21,42.71 v38.3,29.62
EPD_DC  (via drill 0.3)
  Top 0.15: v86.08,13.55 86.63,14.11 86.63,14.52 J1.11 | v11.36,13.28 3.53,21.1 TP11.TP | v13.5,42.57 13.16,42.91 13.16,45.62 U2.5
  Bottom 0.15: v86.08,13.55 85.59,13.55 85.32,13.28 13.5,13.28 | v11.36,13.28 13.5,13.28 | 13.5,13.28 v13.5,42.57
EPD_RST  (via drill 0.3)
  Top 0.15: v87.25,13.55 87.25,14.52 J1.10 | v95.77,17.78 97.09,17.78 103.25,23.94 TP12.TP | v44.11,50.39 29.43,50.39 16.97,62.86 16.97,63.14 U2.21 | v69.46,25.05 v48.13,46.38
  Bottom 0.15: v95.77,17.78 90.58,12.58 88.43,12.58 87.46,13.55 v87.25,13.55 87.19,13.55 86.49,14.25 75.76,14.25 69.46,20.55 v69.46,25.05 | v48.13,46.38 v44.11,50.39
FLASH_CS  (via drill 0.3)
  Top 0.15: v46.6,48.66 46.74,48.8 46.74,49.36 R5.1 | v47.58,48.45 47.58,48.59 48.2,49.22 D9.1 | v46.05,52.13 46.05,57.6 47.02,58.57 47.16,58.57 U1.1 | v45.36,49.91 26.04,49.91 22.02,45.89 22.02,45.69 U2.12
  Bottom 0.15: v47.58,48.45 47.37,48.66 v46.6,48.66 46.6,48.73 45.43,49.91 | v46.05,52.13 46.05,51.78 45.43,51.16 45.43,49.91 | v45.36,49.91 45.43,49.91
GDR  (via drill 0.3)
  Top 0.15: v91,15.35 91.13,15.22 91.13,14.59 J1.2 | v77.91,15.15 69.11,15.15 67.38,16.88 R4.1 67.38,16.95 70.7,20.27 70.7,22.35 70.57,22.49 69.46,22.49 69.18,22.21 66.83,22.21 65.3,20.69 65.3,20.41 Q3.1
  Bottom 0.15: v91,15.35 88.5,15.35 88.29,15.15 v77.91,15.15
GND  (via drill 0.3)
  Top 0.15: C10.2 67.03,107.87 65.79,107.87 65.72,107.94 CHANGE_BUTTON.2 65.65,107.94 62.26,107.94 CHANGE_BUTTON.1 | CHANGE_BUTTON.1 62.19,107.94 53.6,99.35 50.41,99.35 C_DELAY.2 50.34,99.35 49.65,99.35 49.51,99.49 v47.99,99.49 | CHANGE_BUTTON.1 62.05,107.87 61.49,108.43 53.12,108.43 52.7,108.01 52.08,108.01 C6.2 52.01,108.01 50.69,108.01 BOOT_BUTTON.2 50.62,107.94 47.16,107.94 BOOT_BUTTON.1 47.09,108.01 46.95,108.01 46.4,108.56 27.7,108.56 27.15,108.01 C5.2 27.08,108.01 25.83,108.01 RESET_BUTTON.2 25.76,107.94 22.37,107.94 RESET_BUTTON.1 22.3,108.01 22.02,108.01 21.54,108.5 14.54,108.5 7.69,101.64 C9.2 7.62,101.57 7.62,101.43 2.29,96.1 2.29,95.48 J4.G4 2.29,95.41 2.29,95.06 4.71,92.64 4.85,92.64 J4.P6 4.71,92.57 1.25,89.1 1.25,82.32 J4.G3 | TP5.TP 3.32,15.49 2.29,16.53 2.29,33.15 8.03,38.9 8.03,45.62 U2.1 8.1,45.69 v8.1,48.39 | U2.29_7 15.03,51.64 15.03,52.82 U2.29_8 15.03,52.96 15.03,54.13 U2.29_9 14.96,54.13 13.78,54.13 U2.29_6 13.71,54.13 12.53,54.13 U2.29_3 | U2.29_1 12.53,51.64 12.53,52.82 U2.29_2 | U2.29_4 13.71,51.64 12.6,51.64 U2.29_1 | U2.29_5 13.71,52.82 12.6,52.82 U2.29_2 | U2.29_3 12.53,54.06 12.53,52.96 U2.29_2 | U2.29_3 12.46,54.2 9.83,56.83 9.83,60.3 8.1,62.03 8.1,63.14 U2.28 8.1,63.21 8.1,65.7 15.44,73.04 15.44,85.3 J4.G1 15.51,85.37 15.51,86.34 16.34,87.17 16.34,90.14 15.51,90.97 J4.G2 15.51,91.04 15.51,92.08 16.34,92.91 16.34,98.94 | 16.34,98.94 14.13,98.94 D10.2 | 16.34,98.94 46.12,98.94 IC1.3 46.19,98.94 46.6,98.52 v47.02,98.52 47.02,64.11 48.82,62.31 48.82,59.26 47.37,57.8 46.67,57.8 46.33,57.46 46.33,55.8 47.23,54.9 U1.4 47.23,54.83 49.1,54.83
  Top 0.15: v10.11,50.39 11.29,51.57 12.46,51.57 U2.29_1 | SENSOR2.5 158.65,9.68 158.65,9.47 158.17,8.98 157.54,8.98 157.06,9.47 157.06,9.68 SENSOR2.7 156.99,9.74 156.99,10.78 156.3,11.48 156.3,12.58 SENSOR2.1 156.23,12.65 v156.23,13.62 | C1.2 156.02,3.86 154.84,3.86 C2.2 154.84,3.93 154.15,4.62 154.15,12.58 156.19,14.63 | 156.19,14.63 159.14,17.57 165.23,17.57 J3.1 | v156.23,14.59 156.19,14.63 | J2.B12 164.33,51.3 164.33,51.09 J2.A1 164.33,51.02 164.33,49.91 164.88,49.36 J2.MP3 164.95,49.36 166.89,49.36 | 166.89,49.36 168.76,49.36 J2.MP1 | 166.89,59.54 164.95,59.54 J2.MP4 164.88,59.47 164.33,58.91 164.33,57.8 J2.A12 164.33,57.73 164.33,57.53 J2.B1 164.26,57.46 155.4,57.46 149.37,51.43 149.37,49.77 | 166.89,59.54 168.76,59.54 J2.MP2 | 166.89,59.54 166.89,49.36 | C4_USB.2 153.94,46.59 153.94,47.69 C5_USB.2 153.87,47.42 v153.18,47.42 | v156.09,51.16 157.13,51.16 R2-USB1.1 | v153.6,50.74 153.11,50.74 152.7,50.33 D1.2 | U4.9 138.71,52.13 138.71,51.99 138.15,51.43 137.81,51.43 U4.4 137.74,51.36 v134,47.62 | U4.1 137.81,52.89 138.15,52.89 138.71,52.33 138.71,52.2 U4.9 | U4.9 138.78,51.99 139.75,51.99 U4.6 139.82,51.92 140.09,51.92 142.24,49.77 149.37,49.77 | 149.37,49.77 150.06,49.77 R2-USB.2 150.13,49.7 150.27,49.56 v150.27,49.01 | 92.1,49.29 92.86,49.29 94.25,50.67 C10_SUPERCAP.1 | 92.1,49.29 87.39,49.29 86.7,49.98 86.56,49.98 C8.2 86.77,49.98 v86.77,50.81 | 92.1,49.29 92.1,38.76 | 92.1,38.76 92.1,31.35 D3.2 92.03,31.56 v91.13,31.56 | v86.01,51.57 86.42,51.99 86.42,52.96 U3.13 | TP4.TP 101.8,64.73 115.16,51.36 115.16,50.26 C1_BAT.2 115.23,50.19 v117.17,48.25
  Top 0.15: C1_BAT2.2 132.82,37.03 128.74,37.03 128.46,36.75 C3.- 128.39,36.82 127.07,36.82 124.44,39.45 v122.43,39.45 121.74,39.45 121.67,39.38 IC4.2 121.6,39.31 121.47,39.31 119.32,37.17 | C2_BAT.2 129.01,51.92 128.39,51.92 125.76,49.29 125.48,49.29 MCP73831.2 125.76,49.22 126.31,48.66 v126.31,46.93 | 119.32,37.17 119.32,34.54 C1_BAT1.2 | 119.32,37.17 119.25,37.17 117.72,38.69 115.37,38.69 R1_PWRUSB.1 115.3,38.76 92.1,38.76 | v122.85,40.98 122.85,44.78 R2_BAT.1 | 49.1,54.83 49.17,54.83 51.04,56.7 U1.9 | 47.64,27.61 47.64,47.76 47.09,48.32 47.09,48.59 47.51,49.01 47.51,50.05 48.2,50.74 D9.2 48.27,50.81 48.48,51.02 v49.1,51.02 | 47.64,27.61 47.64,26.78 D8.2 | v49.1,52.13 49.1,54.83 | 97.44,13.48 96.05,12.1 92.73,12.1 J1.MP1 92.66,12.1 90.23,12.1 88.22,14.11 88.22,14.52 J1.8 88.22,14.59 v88.22,15.7 | 97.44,13.48 EPD_C1.2 | 97.44,13.48 EPD_C2.2 | 79.78,12.1 81.65,12.1 83.65,14.11 83.65,14.52 J1.17 | 79.78,12.1 79.22,12.1 J1.MP2 | EPD_C5.2 94.73,21.79 93,21.79 EPD_C6.2 92.93,21.86 91.27,21.86 EPD_C7.2 91.2,21.86 89.54,21.86 EPD_C8.2 89.47,21.86 87.81,21.86 EPD_C9.2 87.67,21.86 87.53,21.86 86.77,22.62 v86.7,22.62 85.94,21.86 EPD_C10.2 85.94,21.79 84.14,21.79 EPD_C11.2 84.07,21.79 82.13,21.79 EPD_C12.2 | v86.7,25.6 86.56,25.74 86.01,25.74 C7.2 | D6.2 77.49,23.32 80.54,23.32 82.06,21.79 EPD_C12.2 | 79.78,14.66 79.78,19.44 82.06,21.72 EPD_C12.2 | 79.78,14.66 79.78,12.1 | 79.78,14.66 68.14,14.66 67.38,15.42 R4.2 67.31,15.56 67.31,15.42 66.27,14.38 64.96,14.38 64.13,15.22 64.13,15.42 SJ1.1 64.13,15.49 64.47,15.84 64.47,17.29 R2.1 64.4,17.29 44.39,17.29 40.58,21.1 40.58,25.74 41.27,26.43 41.27,26.64 D12.2 41.34,26.71 45.64,26.71 D11.2 45.5,26.78 v45.5,27.61
  Top 0.15: v47.02,27.61 47.64,27.61
  Bottom 0.15: v10.11,50.39 v8.1,48.39 | v47.02,98.52 v47.99,99.49 | v156.23,13.62 v156.23,14.59 156.23,44.3 153.18,47.35 v153.18,47.42 153.18,49.01 | v156.09,51.16 154.01,51.16 v153.6,50.74 153.6,50.67 153.18,50.26 153.18,49.01 | v150.27,49.01 153.18,49.01 | v86.77,50.81 v86.01,51.57 | v122.43,39.45 122.85,39.87 v122.85,40.98 122.85,41.05 123.61,41.81 | 123.61,41.81 126.31,44.51 v126.31,46.93 126.38,46.93 127.07,47.62 v134,47.62 | 123.61,41.81 v117.17,48.25 | v49.1,51.02 v49.1,52.13 | v88.22,15.7 88.22,19.44 86.28,21.38 86.28,22.14 86.7,22.56 v86.7,22.62 v86.7,25.6 86.7,25.67 91.13,30.1 v91.13,31.56 | v45.5,27.61 v47.02,27.61
  pour Top: -6.44,115.71 -6.46,115.69 -6.48,115.67 -6.52,115.67 -6.52,-4.17 175.42,-4.17 175.42,70.17 97.08,70.17 97.06,70.19 97.04,70.21 97.02,70.23 97.02,115.77 -6.42,115.77 -6.42,115.73
  pour Bottom: -6.32,-4.07 174.92,-4.07 174.92,-4.03 174.94,-4.01 174.96,-3.99 174.98,-3.97 176.02,-3.97 176.02,70.67 97.58,70.67 97.58,70.33 97.56,70.31 97.54,70.29 97.52,70.27 97.48,70.27 97.46,70.29 97.44,70.31 97.42,70.33 97.42,116.37 -6.32,116.37
GPIO8
  Top 0.15: R1.2 18.91,42.98 18.91,45.06 19.46,45.62 U2.10
I2C_PW  (via drill 0.3)
  Top 0.15: C2.1 154.84,5.17 156.02,5.17 C1.1 156.02,5.24 156.23,5.45 156.23,9.68 SENSOR2.8 156.23,9.74 156.23,11.13 155.74,11.61 155.74,13.76 156.09,14.11 156.37,14.11 156.99,13.48 156.99,12.65 SENSOR2.2 157.06,12.58 157.06,11.75 | 157.06,11.75 157.06,11.13 157.82,10.37 157.82,9.74 SENSOR2.6 | v48.34,60.44 24.45,60.44 22.02,62.86 22.02,63.14 U2.17 | v156.99,11.75 157.06,11.75
  Bottom 0.15: v48.34,60.44 48.54,60.44 54.08,54.9 143.76,54.9 150.13,48.52 151.17,48.52 151.24,48.59 151.52,48.59 152.7,47.42 152.7,16.05 v156.99,11.75
INT_RTC  (via drill 0.3)
  Top 0.15: 86.98,63.55 86.98,63.41 87.74,62.65 U3.3 | 86.98,63.55 86.98,65.91 R1_PINH1.1 | v16.27,44.51 16.9,45.13 16.9,45.62 U2.8 | TP15.TP 3.53,32.67 8.38,37.51 v8.38,38.07 8.38,38.14 16.48,38.14 19.46,41.11 v43.49,41.11 | 86.98,63.55 81.02,63.55 71.53,54.06 v71.53,53.93
  Bottom 0.15: v16.27,44.51 14.82,44.51 v8.38,38.07 | v71.53,53.93 56.3,53.93 v43.49,41.11
IO/BOOT  (via drill 0.3)
  Top 0.15: C6.1 52.01,109.33 50.76,109.33 50.69,109.4 BOOT_BUTTON.3 50.62,109.4 49.31,109.4 48.34,108.43 v48.27,108.43 47.3,109.4 47.16,109.4 BOOT_BUTTON.4 47.09,109.4 47.02,109.33 45.91,109.33 R_BOOT.2 | v24.58,79.13 24.58,63.21 U2.15
  Bottom 0.15: v24.58,79.13 48.27,102.82 v48.27,108.43
IO/CHANGE  (via drill 0.3)
  Top 0.15: C10.1 67.03,109.19 65.93,109.19 65.72,109.4 CHANGE_BUTTON.3 65.65,109.47 62.26,109.47 CHANGE_BUTTON.4 62.19,109.4 61.98,109.19 60.94,109.19 R_CHANGE.2 60.87,109.12 v60.11,109.12 | v20.57,69.58 14.4,63.41 14.4,63.21 U2.23
  Bottom 0.15: v60.11,109.12 v20.57,69.58
MISO  (via drill 0.3)
  Top 0.15: R8.1 41.34,22.76 41.34,25.12 D12.1 41.34,25.19 v42.03,25.88 | v46.81,56.77 47.16,57.11 47.16,57.32 U1.2 | v23.61,66.05 22.64,67.01 TP6.TP | v16.48,61.54 10.46,61.54 9.35,62.65 9.35,63.14 U2.27 9.35,63.21 9.63,63.48 v9.63,64.24 | v6.44,92.5 5.26,93.68 5.12,93.68 J4.P7
  Bottom 0.15: 42.03,56.77 32.89,56.77 v23.61,66.05 23.27,66.05 18.77,61.54 v16.48,61.54 | 42.03,56.77 v46.81,56.77 | v6.44,92.5 6.44,68.54 8.38,66.6 9.28,66.6 9.63,66.25 v9.63,64.24 | 42.03,56.77 v42.03,25.88
MOSI  (via drill 0.3)
  Top 0.15: v85.18,13.76 85.18,14.52 J1.14 | R7.1 46.05,22.83 46.19,22.97 v46.19,23.52 46.19,23.59 45.7,24.08 45.7,25.26 D11.1 | v54.98,47 54.98,54.76 U1.5 | v42.52,42.22 17.94,42.22 15.72,44.44 15.72,45.62 U2.7 15.65,45.69 15.65,54.62 10.11,60.16 v10.11,60.78 | v4.36,88.55 5.05,89.24 J4.P3 | v54.64,14.94 43.35,3.65 TP7.TP
  Bottom 0.15: v85.18,13.76 55.95,13.76 54.67,15.04 | v46.19,23.52 46.99,22.73 | 46.99,22.73 54.67,15.04 | v54.98,47 54.98,38.9 50.03,33.95 | 50.03,33.95 44.87,28.79 44.87,27.61 46.95,25.53 48.68,25.53 49.03,25.19 49.03,24.77 46.99,22.73 | v42.52,42.22 42.52,41.46 50.03,33.95 | v4.36,88.55 4.36,66.53 v10.11,60.78 | v54.64,14.94 54.64,15.01 54.67,15.04
N$1
  Top 0.15: R2-USB1.2 157.2,52.47 163.08,52.47 163.71,53.09 164.26,53.09 J2.A5
N$2
  Top 0.15: R2-USB.1 150.13,51.09 150.55,51.09 155.6,56.14 164.26,56.14 J2.B5
N$3  (via drill 0.3)
  Top 0.15: C1_BAT1.1 120.63,34.54 120.63,37.38 121.6,38.34 IC4.3 121.67,38.41 v123.61,38.41 | D2.2 118.21,39.38 120.63,39.38 121.6,40.35 IC4.1 121.67,40.28 122.23,40.28 122.78,39.73 v125.2,39.73 | v132.61,47.14 133.03,47.55 133.03,47.97 Q1.3
  Bottom 0.15: v132.61,47.14 v125.2,39.73 125.14,39.73 123.82,38.41 v123.61,38.41
N$4  (via drill 0.3)
  Top 0.15: v121.88,48.25 119.32,48.25 118.69,48.87 118.56,48.87 R1_BAT.1 | v124.51,48.73 125,48.73 125.41,48.32 MCP73831.1
  Bottom 0.15: v121.88,48.25 124.03,48.25 v124.51,48.73
N$5
  Top 0.15: CHG_LED.C 118.69,50.19 118.69,50.05 119.8,48.94 R1_BAT.2
N$6  (via drill 0.3)
  Top 0.15: C4.1 97.5,31.35 95.63,31.35 D3.1 95.7,31.28 v95.7,30.52 | v95.7,28.65 95.7,27.89 D4.2
  Bottom 0.15: v95.7,30.52 v95.7,28.65
N$7
  Top 0.15: J1.24 80.19,14.59 80.19,18.61 82.06,20.48 EPD_C12.1
N$8
  Top 0.15: R2_BAT.2 122.92,46.17 122.92,48.25 MCP73831.5
N$9
  Top 0.15: J1.18 83.24,14.59 83.24,14.94 87.39,19.09 91.48,19.09 92.93,20.55 EPD_C6.1
N$10
  Top 0.15: J1.19 82.75,14.59 82.75,15.01 87.12,19.37 90.03,19.37 EPD_C7.1
N$11
  Top 0.15: J1.20 82.2,14.59 82.2,14.94 86.91,19.65 88.57,19.65 89.47,20.55 EPD_C8.1
N$12
  Top 0.15: IC1.5 48.96,100.81 50.14,100.81 50.34,100.6 C_DELAY.1
N$13
  Top 0.15: J1.22 81.23,14.59 81.23,15.77 85.94,20.48 EPD_C10.1
N$14
  Top 0.15: R_CAPACITOR.2 95.63,55.1 95.63,56 97.09,57.46 D7.2
N$16  (via drill 0.3)
  Top 0.15: v88.64,13.07 85.25,13.07 84.69,13.62 84.69,14.52 J1.15 | v93.83,19.58 94.73,20.48 EPD_C5.1
  Bottom 0.15: v88.64,13.07 90.44,13.07 93.83,16.46 v93.83,19.58
N$17
  Top 0.15: J1.5 89.75,14.52 89.75,13.9 90.37,13.28 95.91,13.28 96.12,13.48 EPD_C2.1
N$18
  Top 0.15: J1.4 90.23,14.59 90.23,15.22 92.1,17.09 95.01,17.09 EPD_C1.1
PREVGH  (via drill 0.3)
  Top 0.15: 86.87,20.1 87.32,20.55 87.67,20.55 EPD_C9.1 | 86.87,20.1 81.72,14.94 81.72,14.59 J1.21 | v83.24,33.84 83.24,35.51 D5.2 | v86.84,20.13 86.87,20.1
  Bottom 0.15: v83.24,33.84 83.24,32.8 86.01,30.04 86.01,20.96 v86.84,20.13
PREVGL  (via drill 0.3)
  Top 0.15: J1.23 80.75,14.59 80.75,17.09 84.07,20.41 EPD_C11.1 84.14,20.48 84.76,21.1 86.36,21.1 v86.77,21.52 | v92.1,26.85 92.1,27.82 D4.1
  Bottom 0.15: v86.77,21.52 v92.1,26.85
RESE  (via drill 0.3)
  Top 0.15: v90.51,13.76 90.65,13.9 90.65,14.52 J1.3 | v71.19,21.24 71.19,22.28 70.29,23.18 70.08,23.18 R3.1 | v70.22,20.41 66.55,20.41 Q3.2
  Bottom 0.15: v90.51,13.76 87.67,13.76 86.77,14.66 77.77,14.66 v71.19,21.24 71.05,21.24 v70.22,20.41
RESE'
  Top 0.15: SJ1.2 65.65,15.49 65.79,15.63 65.79,17.29 R2.2 65.86,17.36 65.86,20.82 66.89,21.86 70.01,21.86 R3.2
RESET  (via drill 0.3)
  Top 0.15: R_RESET.2 21.05,109.26 22.16,109.26 22.3,109.4 RESET_BUTTON.4 22.37,109.47 25.76,109.47 RESET_BUTTON.3 25.83,109.4 25.9,109.33 27.08,109.33 C5.1 27.15,109.26 v38.71,109.26 | v46.4,101.57 46.19,101.36 46.19,100.88 IC1.1 | v11.43,51.09 10.6,50.26 10.6,45.69 U2.3
  Bottom 0.15: v38.71,109.26 v46.4,101.57 46.33,101.57 11.43,66.67 v11.43,51.09
RTC_RST  (via drill 0.3)
  Top 0.15: v48.34,62.17 24.03,62.17 23.34,62.86 23.34,63.14 U2.16 | v85.87,61.13 85.87,61.68 86.42,62.24 U3.4
  Bottom 0.15: v48.34,62.17 84.83,62.17 v85.87,61.13
RX  (via drill 0.3)
  Top 0.15: v9.76,66.74 13.09,63.41 13.09,63.21 U2.24 | v7.62,67.98 7.62,67.64 6.86,66.88 TP2.TP
  Bottom 0.15: v9.76,66.74 9.56,66.74 8.31,67.98 v7.62,67.98
SCK  (via drill 0.3)
  Top 0.15: v85.59,15.63 85.66,15.56 85.66,14.59 J1.13 | v73.82,28.16 73.82,37.31 55.05,56.07 U1.6 54.91,56.07 v53.53,56.07 | D10.1 12.53,98.94 11.08,100.39 9.42,100.39 R6.1 9.42,100.32 v8.79,99.7 | v7.13,98.04 7.13,92.57 6.09,91.53 5.12,91.53 J4.P5 | v14.34,42.57 14.34,45.62 U2.6 | v13.99,37.65 13.64,37.65 3.67,27.68 TP8.TP
  Bottom 0.15: v85.59,15.63 84.07,15.63 73.82,25.88 v73.82,28.16 | v8.79,99.7 v7.13,98.04 7.13,69.99 11.08,66.05 11.08,51.36 10.94,51.23 10.94,50.46 11.18,50.22 | v13.99,37.65 14.34,38 v14.34,42.57 14.96,42.57 16.76,44.37 16.76,44.65 11.18,50.22 | v53.53,56.07 53.32,56.07 42.87,66.53 20.84,66.53 11.91,57.6 11.91,50.95 11.18,50.22
SCL  (via drill 0.3)
  Top 0.15: v140.72,51.92 140.23,52.4 139.82,52.4 U4.7 | v140.72,45.2 165.23,20.69 J3.4 165.3,20.62 165.58,20.62 166.41,19.79 166.41,15.98 160.83,10.4 | 160.83,10.4 158.51,8.08 158.51,5.1 R2-PINH.1 | v159.9,11.34 158.65,12.58 SENSOR2.4 | v160.8,10.44 160.83,10.4 | v18.21,64.52 18.21,63.21 U2.20 | v87.74,55.86 90.23,53.37 90.23,53.03 U3.16 90.3,53.37 90.86,53.93 v91,53.93
  Bottom 0.15: v140.72,45.2 v140.72,51.92 140.72,53.16 139.95,53.93 v91,53.93 | v160.8,10.44 v159.9,11.34 | v18.21,64.52 18.42,64.52 20.71,66.81 43.07,66.81 53.32,56.56 87.05,56.56 v87.74,55.86
SDA  (via drill 0.3)
  Top 0.15: 159.14,10.85 159.14,11.06 157.89,12.31 157.89,12.58 SENSOR2.3 | 159.14,10.85 159.14,9.12 157.27,7.25 157.27,5.1 R1-PINH.1 | v139.82,53.44 139.82,52.96 U4.8 | v139.82,44.78 164.95,19.65 165.23,19.65 J3.3 165.3,19.58 165.58,19.58 166.13,19.02 166.13,16.95 160.04,10.85 159.14,10.85 | v45.91,51.02 31.37,51.02 19.53,62.86 19.53,63.14 U2.19 | v87.95,54.41 88.99,53.37 88.99,53.03 U3.15
  Bottom 0.15: v139.82,44.78 v139.82,53.44 88.99,53.44 88.02,54.41 v87.95,54.41 50.76,54.41 47.37,51.02 v45.91,51.02
SRC  (via drill 0.3)
  Top 0.15: 87.08,34.99 86.77,35.3 86.77,35.51 D5.1 | 87.08,34.99 91.41,30.66 92.73,30.66 94.73,32.67 97.5,32.67 C4.2 | v77.21,25.19 76.11,24.08 69.73,24.08 68.14,22.49 65.93,22.49 Q3.3 | v83.82,31.4 84.97,32.54 L1.1 85.04,32.94 87.08,34.99
  Bottom 0.15: v83.82,31.4 77.61,25.19 v77.21,25.19
SS_SD  (via drill 0.3)
  Top 0.15: v47.58,23.94 47.58,22.83 R10.1 | v48.54,25.05 47.92,25.05 47.71,25.26 D8.1 | v17.31,42.22 17.17,42.08 13.37,42.08 11.91,43.54 11.91,45.62 U2.4 | v7.62,86.06 5.54,88.14 J4.P2 | v18.91,74.77 18.91,71.86 21.4,69.37 21.4,64.94 v22.09,64.24
  Bottom 0.15: v48.54,25.05 47.58,24.08 v47.58,23.94 47.51,24.08 43.21,24.08 25.07,42.22 22.09,42.22 | 22.09,42.22 v17.31,42.22 | v18.91,74.77 v7.62,86.06 | 22.09,42.22 v22.09,64.24
TX  (via drill 0.3)
  Top 0.15: v9.14,66.11 11.84,63.41 11.84,63.21 U2.25 | v5.4,66.11 3.88,66.11 3.12,66.88 TP1.TP
  Bottom 0.15: v5.4,66.11 v9.14,66.11
USB_D+  (via drill 0.3)
  Top 0.15: v151.66,50.88 152,51.23 152.63,51.23 D1.1 | v54.22,55.38 53.39,55.38 v53.18,55.17 | v42.52,49.42 28.32,49.42 24.58,45.69 U2.14
  Bottom 0.15: v151.66,50.88 148.19,50.88 143.69,55.38 v54.22,55.38 | v53.18,55.17 48.27,55.17 v42.52,49.42
USB_D-  (via drill 0.3)
  Top 0.15: v151.38,48.11 152.63,49.36 D1.3 | v45.43,42.43 42.94,42.43 40.72,44.65 24.03,44.65 23.34,45.34 23.34,45.62 U2.13
  Bottom 0.15: v151.38,48.11 144.25,48.11 140.44,44.3 137.95,44.3 133.03,49.22 52.22,49.22 v45.43,42.43
VBAT
  Top 0.3: U4.2 137.81,52.4 137.81,51.99 U4.3 137.67,51.85 133.72,51.85 132.2,50.33 132.06,50.26 | 132.06,50.26 132.06,45.96 Q1.1 | 132.06,50.26 129.08,53.23 C2_BAT.1 | MCP73831.3 125.48,50.26 126.03,50.26 128.94,53.16 C2_BAT.1 | TP3.TP 129.91,64.38 129.91,54.13 129.15,53.37 C2_BAT.1
VBUS
  Top 0.3: C5_USB.1 155.26,47.69 155.26,46.59 C4_USB.1 155.26,46.38 155.26,44.16 PFMF.050.1.2 155.26,44.02 153.18,41.95 149.93,41.95 149.72,42.15 149.72,45.96 | 149.72,45.96 150.83,47.07 150.83,50.81 151.87,51.85 153.39,51.85 153.53,51.71 153.53,51.57 154.77,50.33 D1.5 | R1_PWRUSB.2 115.37,40.08 116.41,40.08 117.79,41.46 118.14,41.46 D2.1 117.72,41.6 117.72,49.98 117.59,50.12 117.52,50.26 | 117.52,50.26 116.55,50.26 C1_BAT.1 | 118.14,50.88 117.52,50.26 | 118.14,50.88 119.53,50.88 120.08,50.33 CHG_LED.A 120.22,50.26 122.85,50.26 MCP73831.4 122.92,50.05 122.92,49.56 127.35,45.13 132.61,45.13 133.38,45.89 134,45.89 Q1.2 134.14,45.96 149.72,45.96 | TP14.TP 117.1,64.52 117.1,51.99 118.07,51.02 118.14,50.88
VRTC
  Top 0.3: R_CAPACITOR.1 94.32,55.03 94.32,52.96 C10_SUPERCAP.2 94.11,52.89 91.89,52.89 90.65,51.64 87.81,51.64 | 87.81,51.64 87.81,52.96 U3.14 | 87.81,51.64 87.81,50.05 C8.1
VUSB
  Top 0.3: J2.A9 164.33,56.9 164.33,56.7 J2.B4 164.47,56.63 165.02,56.63 165.23,56.42 165.23,52.4 165.02,52.2 164.47,52.2 J2.B9 164.33,52.13 164.33,51.92 J2.A4 164.19,51.85 159.07,51.85 155.67,48.45 153.46,48.45 150.83,45.82 150.83,44.09 PFMF.050.1.1